# Altium PCB PCB1.PcbDoc
Units mm, origin at the board's own origin, x right, y up, seen from the top; angles counter-clockwise.
Board outline 90 x 105 mm, 4 copper layers (Top Layer, Signal Layer 1, Signal Layer 2, Bottom Layer), stack 0.778 mm thick; 73 components, 98 nets, 280 pads, 62 vias.
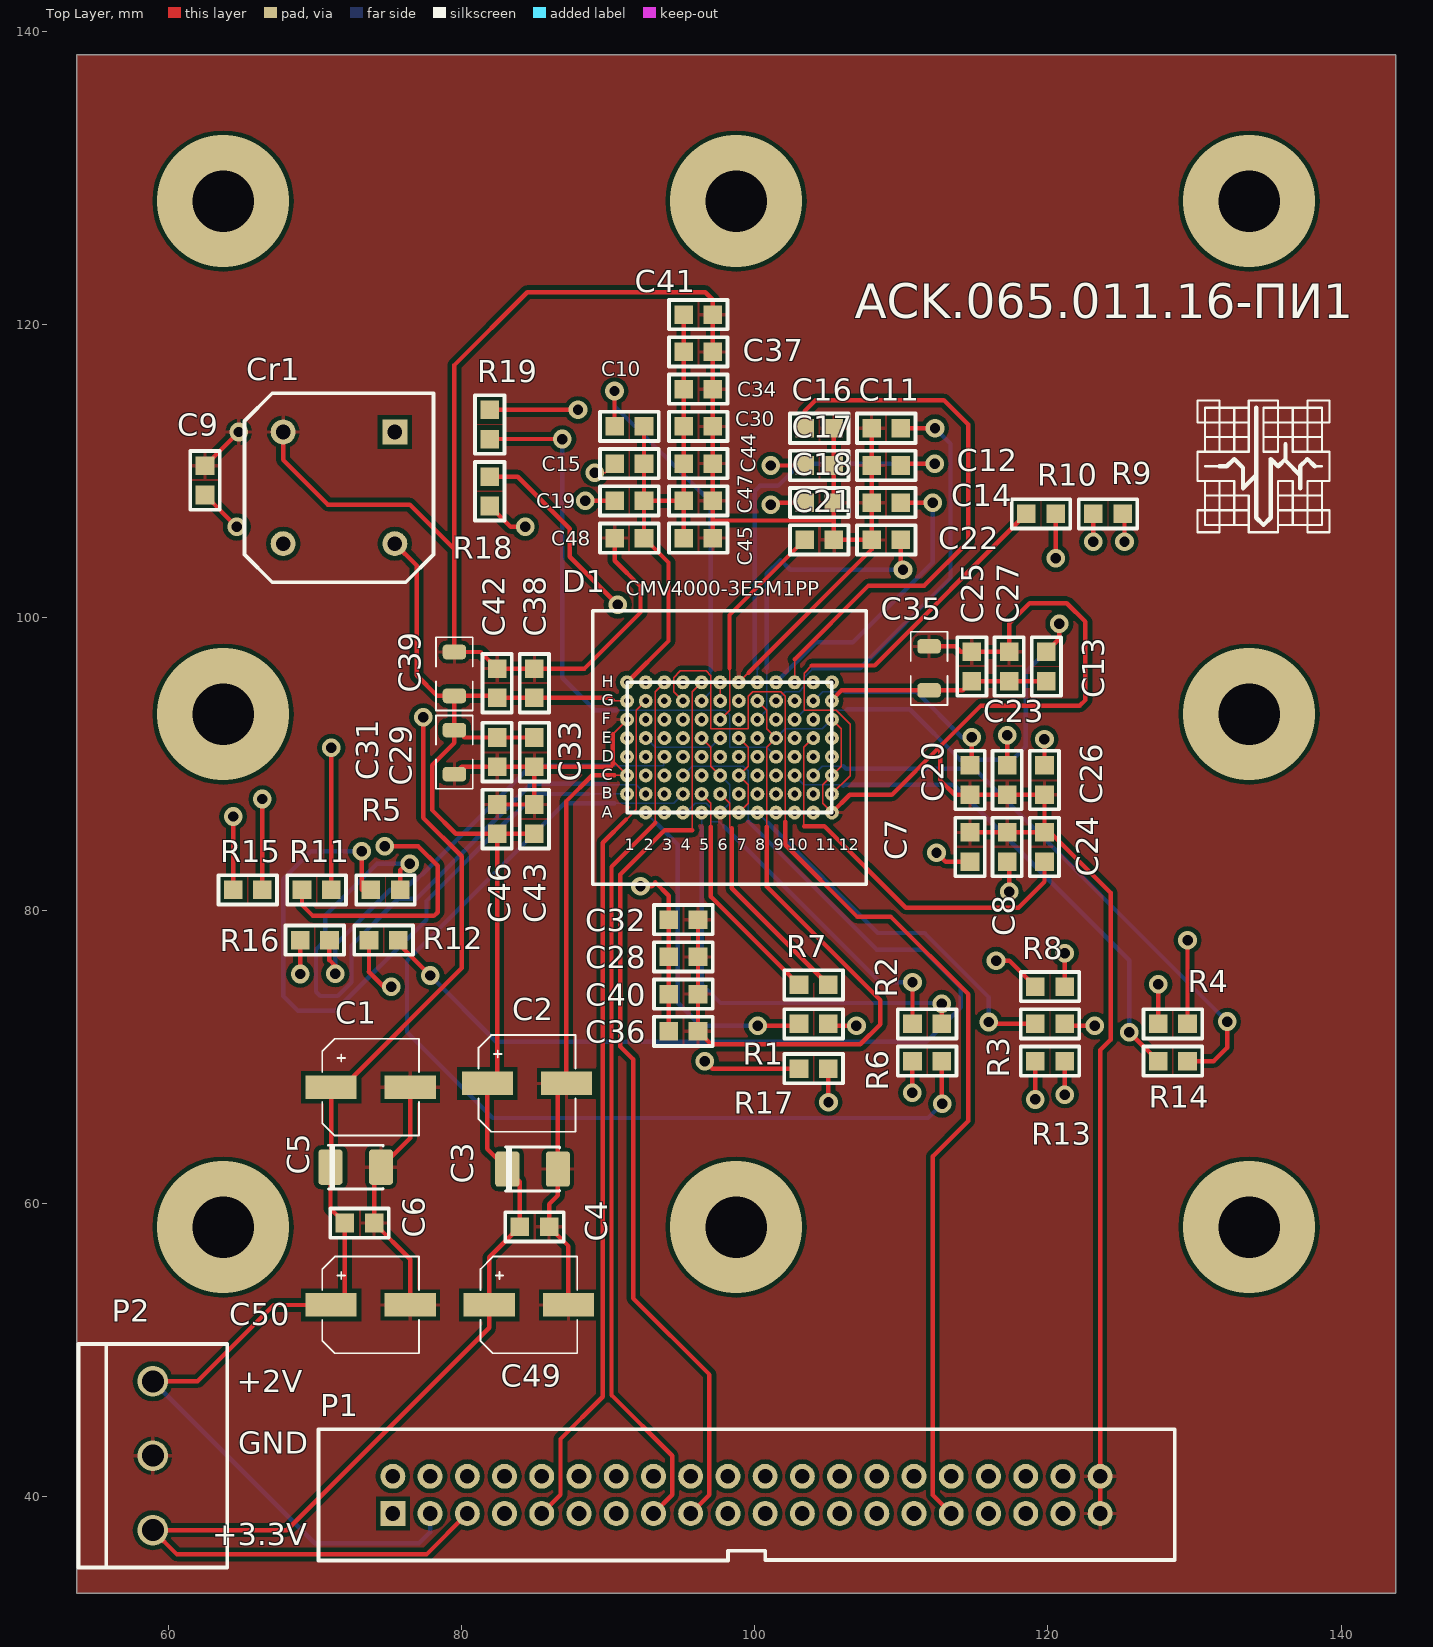
[diagram p0: Top Layer view]
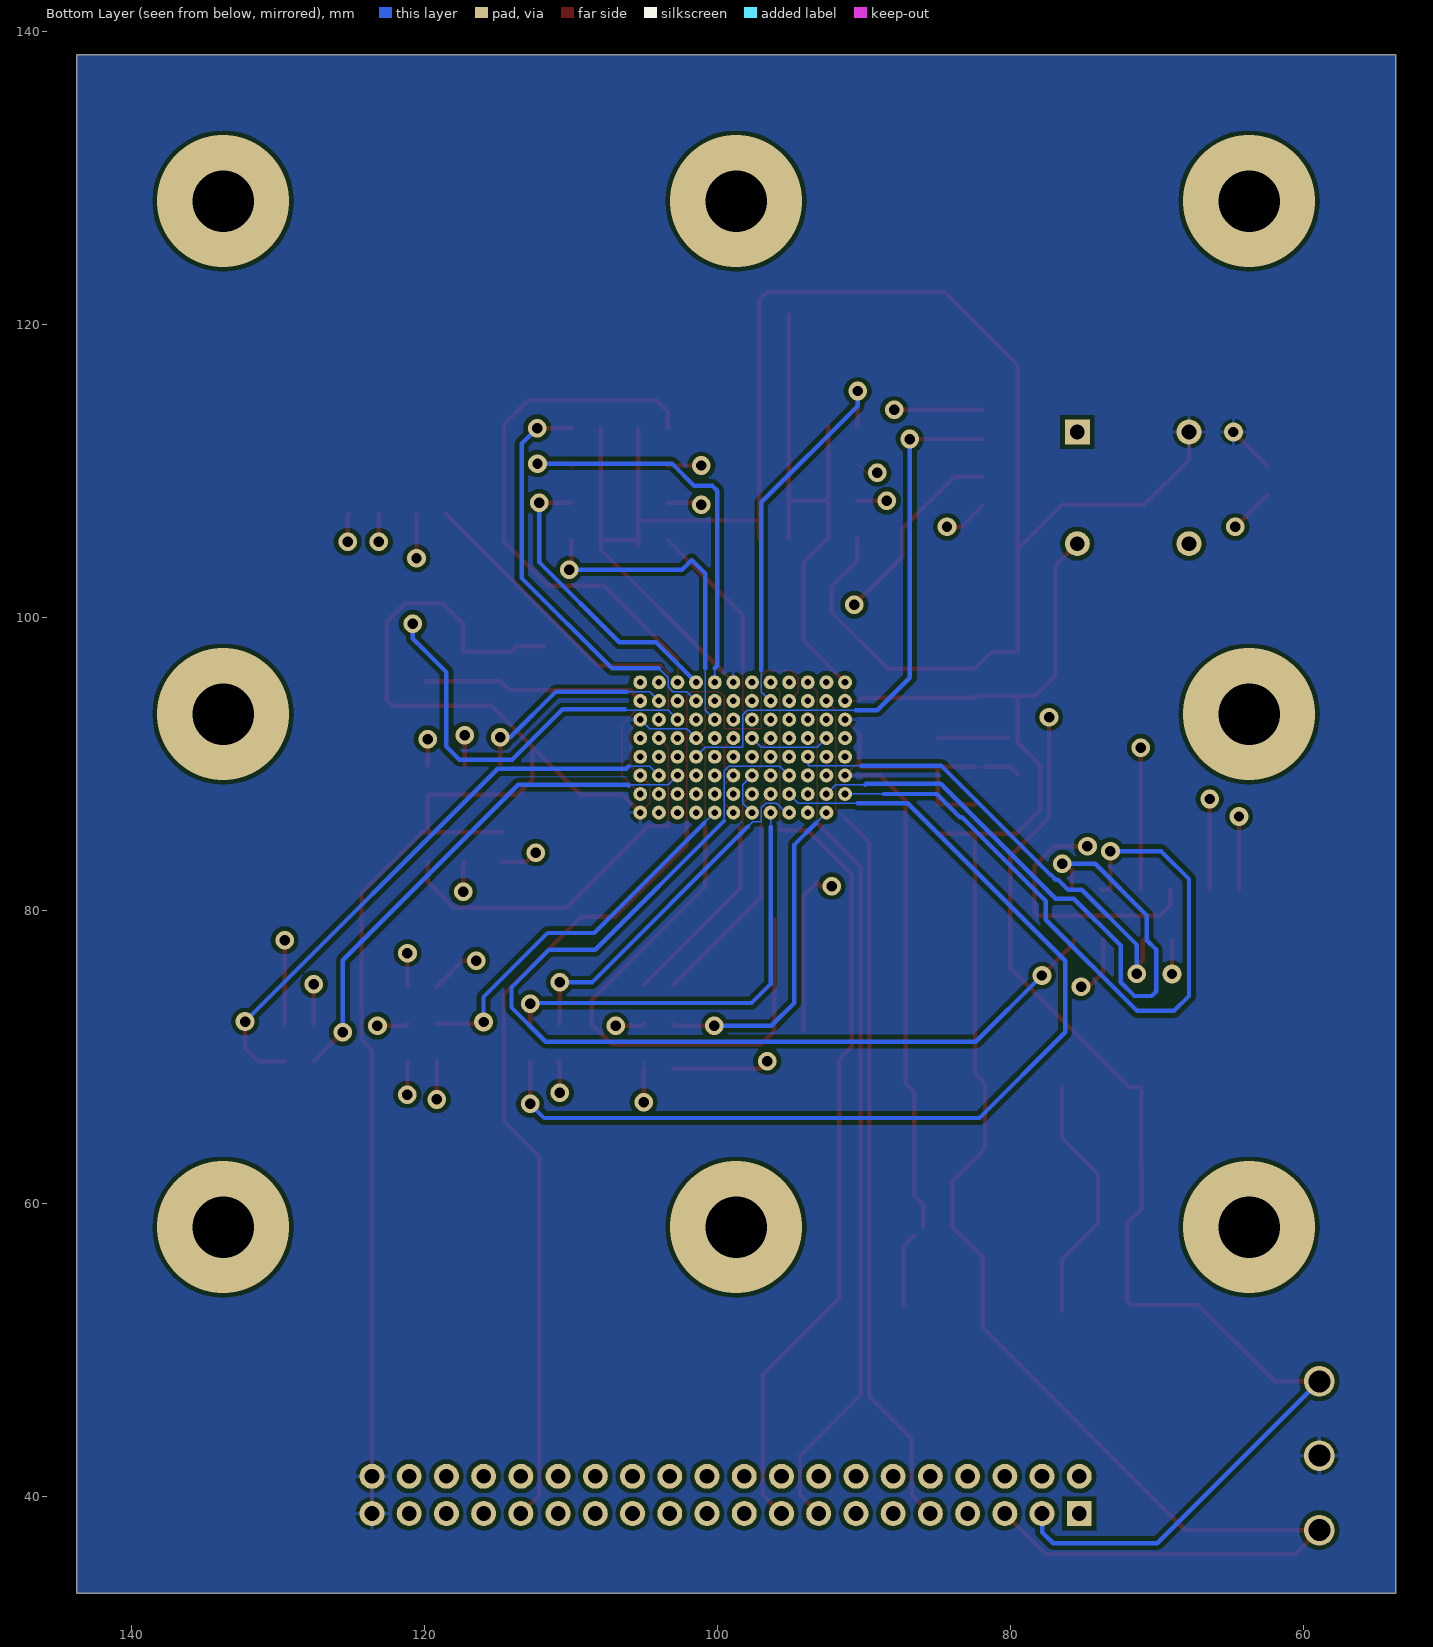
[diagram p1: Bottom Layer view, seen from below]
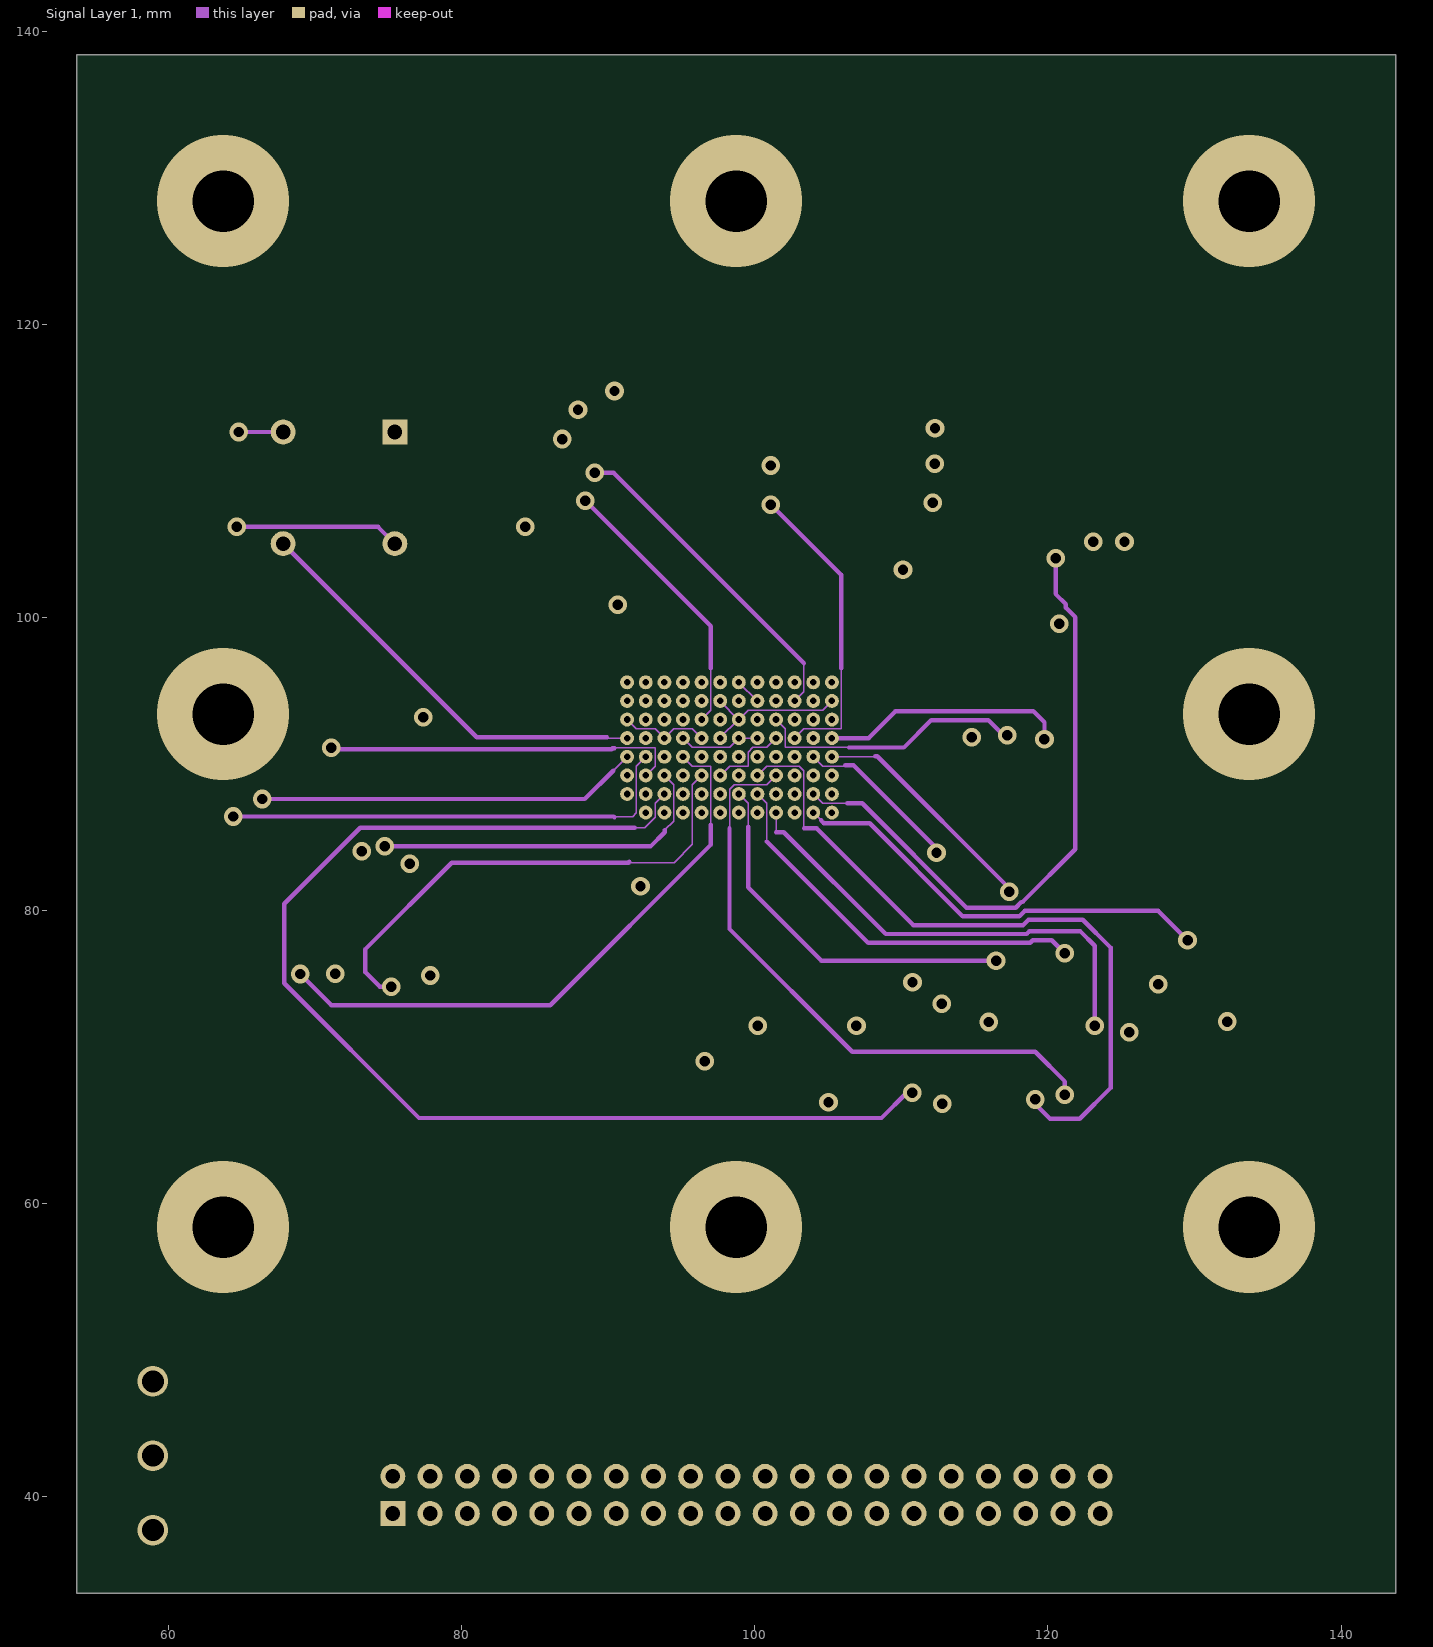
[diagram p2: Signal Layer 1]
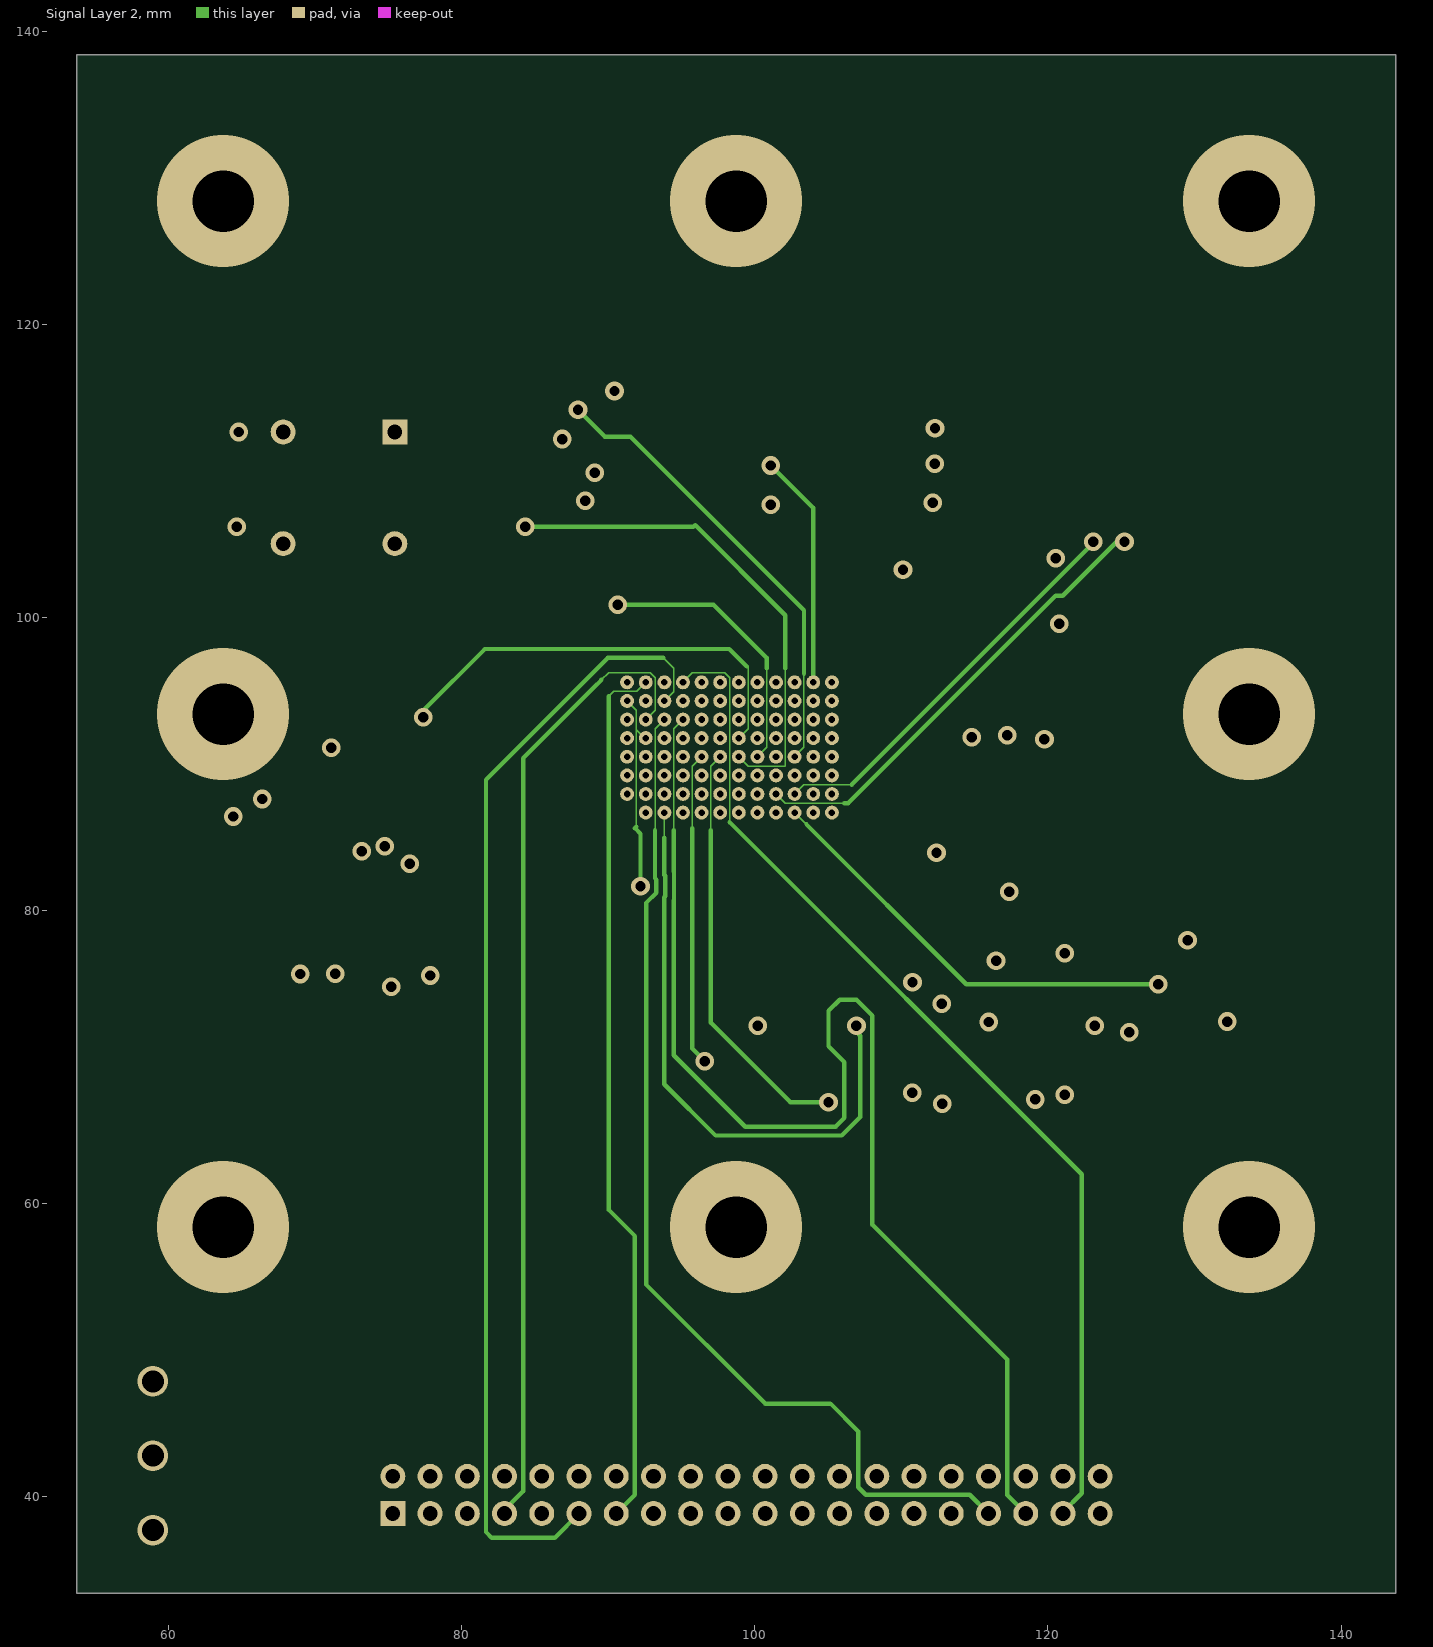
[diagram p3: Signal Layer 2]

## Layer stack, top to bottom
Top Solder: solder mask 0.0102, Solder Resist, Dk 3.5
Top Layer: signal copper 0.0356
Dielectric 1: core 0.254, FR-4, Dk 4.2
Signal Layer 1: signal copper 0.036
Dielectric 3: prepreg 0.127, Dk 4.2
Signal Layer 2: signal copper 0.036
Dielectric 2: core 0.254, Dk 4.2
Bottom Layer: signal copper 0.0356
Bottom Solder: solder mask 0.0102, Solder Resist, Dk 3.5

## Board outline
53.721,33.401 53.721,138.401 143.721,138.401 143.721,33.401

## Design rules (kind name [scope] priority, off if disabled: settings)
Clearance [All] p1: gap=0.1 except(0.3: Arc-Poly Track-Poly SMDPad-Poly THPad-Poly Via-Poly Fill-Poly Poly-Poly)
HoleSize [All] p1: absolutevalues=TRUE maxlimit=5 minlimit=0.025 maxpercent=80.000 minpercent=20.000
MinimumSolderMaskSliver [All] p1: minsoldermaskwidth=0.1
PolygonConnect [All] p1: connectstyle=Relief reliefconductorwidth=0.254 reliefentries=4 polygonreliefangle="90 Angle" airgapwidth=0.254
RoutingVias [All] p1: holewidth=0.711 width=1.27 viastyle="Through Hole" minholewidth=0.711 minwidth=1.27 maxholewidth=0.711 maxwidth=1.27
SilkToSilkClearance [All] p1 off: silktosilkclearance=0.254
SilkToSolderMaskClearance [IsPad] p1 off: minsilkscreentomaskgap=0.254 clearancetoexposedcopper=TRUE
SolderMaskExpansion [All] p1: expansion=0.102
Width [All] p1: maxlimit=0.3 minlimit=0.1 preferedwidth=0.1
26 further rules are at their usual default settings.

## Components (designator, comment, footprint, x,y, rotation, side; value= is the part's Value field where it differs from the comment)
C1 "220u" "EL SMD Case D D6.3x6.6 h7.7(0605)" 84.455,68.199 r0 top
C2 "33uF" "EL Case B (3528-21)" 84.836,62.357 r0 top
C3 "220u" "EL SMD Case D D6.3x6.6 h7.7(0605)" 73.787,67.945 r0 top
C4 "10uF" C_0805 84.963,58.42 r180 top
C5 "33uF" "EL Case B (3528-21)" 72.771,62.484 r0 top
C6 "10uF" C_0805 73.025,58.674 r180 top
C7 "100nF" C_0805 114.681,84.328 r270 top
C8 "100nF" C_0805 117.221,84.328 r90 top
C9 "100nF" C_0805 62.484,109.347 r90 top
C10 "100nF" C_0805 91.44,113.03 r180 top
C11 "100nF" C_0805 108.966,112.903 r0 top
C12 "100nF" C_0805 108.966,110.363 r0 top
C13 "100nF" C_0805 119.888,96.647 r90 top
C14 "100nF" C_0805 108.966,107.823 r0 top
C15 "100nF" C_0805 91.44,110.49 r180 top
C16 "100nF" C_0805 104.394,112.903 r180 top
C17 "100nF" C_0805 104.394,110.363 r180 top
C18 "100nF" C_0805 104.394,107.823 r180 top
C19 "100nF" C_0805 91.44,107.95 r180 top
C20 "100nF" C_0805 114.681,88.9 r90 top
C21 "100nF" C_0805 104.394,105.283 r180 top
C22 "100nF" C_0805 108.966,105.283 r0 top
C23 "100nF" C_0805 117.221,88.9 r90 top
C24 "100nF" C_0805 119.761,84.328 r270 top
C25 "100nF" C_0805 114.808,96.647 r90 top
C26 "100nF" C_0805 119.761,88.9 r90 top
C27 "4.7uF" C_0805 117.348,96.647 r90 top
C28 "100nF" C_0805 95.123,76.835 r0 top
C29 "100nF" C_0805 82.423,90.805 r270 top
C30 "100nF" C_0805 96.139,113.03 r0 top
C31 "100u" C1206(3216) 79.502,90.805 r270 top
C32 "4.7uF" C_0805 95.123,79.375 r0 top
C33 "4.7uF" C_0805 84.963,90.805 r270 top
C34 "4.7uF" C_0805 96.139,115.57 r0 top
C35 "100u" C1206(3216) 111.887,96.52 r90 top
C36 "100nF" C_0805 95.123,71.755 r0 top
C37 "100nF" C_0805 96.139,118.11 r0 top
C38 "100nF" C_0805 84.963,95.504 r90 top
C39 "100u" C1206(3216) 79.502,96.139 r90 top
C40 "4.7uF" C_0805 95.123,74.295 r0 top
C41 "4.7uF" C_0805 96.139,120.65 r0 top
C42 "4.7uF" C_0805 82.423,95.504 r90 top
C43 "100nF" C_0805 84.963,86.233 r90 top
C44 "100nF" C_0805 96.139,110.49 r0 top
C45 "100nF" C_0805 96.139,105.41 r0 top
C46 "4.7uF" C_0805 82.423,86.233 r90 top
C47 "4.7uF" C_0805 96.139,107.95 r0 top
C48 "4.7uF" C_0805 91.44,105.41 r180 top
C49 "100u" "EL SMD Case D D6.3x6.6 h7.7(0605)" 84.582,53.086 r0 top
C50 "100u" "EL SMD Case D D6.3x6.6 h7.7(0605)" 73.787,53.086 r0 top
Cr1 "5MHz" quarts_gen_2.54 71.628,108.839 r270 top
D1 "CMV4000-3E5M1PP" cmv4000 91.44,86.741 r0 top
P1 "IDC-40" IDC-40 99.434,40.126 r90 top
P2 "MPW-3" MPW-3 58.928,42.799 r270 top
R1 "100 Ом" R_0805 104.013,72.263 r180 top
R2 "100 Ом" R_0805 111.76,72.263 r180 top
R3 "100 Ом" R_0805 120.142,72.263 r180 top
R4 "100 Ом" R_0805 128.524,72.263 r180 top
R5 "100 Ом" R_0805 74.803,81.407 r180 top
R6 "100 Ом" R_0805 111.76,69.723 r180 top
R7 "100 Ом" R_0805 104.013,74.93 r180 top
R8 "100 Ом" R_0805 120.142,74.803 r180 top
R9 "100 Ом" R_0805 124.095,107.061 r0 top
R10 "100 Ом" R_0805 119.523,107.061 r0 top
R11 "100 Ом" R_0805 70.104,81.407 r0 top
R12 "100 Ом" R_0805 74.676,77.978 r0 top
R13 "100 Ом" R_0805 120.142,69.723 r180 top
R14 "100 Ом" R_0805 128.524,69.723 r180 top
R15 "100 Ом" R_0805 65.405,81.407 r0 top
R16 "100 Ом" R_0805 69.977,77.978 r0 top
R17 "100 Ом" R_0805 104.013,69.215 r180 top
R18 "100 Ом" R_0805 81.915,108.601 r270 top
R19 "100 Ом" R_0805 81.915,113.157 r270 top

## Footprints (in the part's own frame and the unit in brackets; to place one, negate y for a bottom-side part, rotate by r counter-clockwise, add the part's x,y. Pads: shape width x height; smd on the part's side, far side on the other; paste and mask are expansions set on the pad)
C1206(3216) [mm]
  rrect50% 1x1.6 smd: 1(-1.5,0) 2(1.5,0)
  silkscreen extent -2.5,-1.25 2.5,1.25, body extent -1.6,-0.8 1.6,0.8, height 1
C_0805 [mm]
  rect 1.27x1.27 smd: 1(-1,0) 2(1,0)
  silkscreen extent -2,-1 2,1
cmv4000 [mm]
  round 0.95 hole 0.45: A2(1.117,-0.062) A3(2.387,-0.062) A4(3.657,-0.062) A5(4.927,-0.062) A6(6.197,-0.062) A7(7.467,-0.062) A8(8.737,-0.062) A9(10.007,-0.062) A10(11.277,-0.062) A11(12.547,-0.062) A12(13.817,-0.062) B1(-0.153,1.208) B2(1.117,1.208) B3(2.387,1.208) B4(3.657,1.208) B5(4.927,1.208) B6(6.197,1.208) B7(7.467,1.208) B8(8.737,1.208) B9(10.007,1.208) B10(11.277,1.208) B11(12.547,1.208) B12(13.817,1.208) C1(-0.153,2.478) C2(1.117,2.478) C3(2.387,2.478) C4(3.657,2.478) C5(4.927,2.478) C6(6.197,2.478) C7(7.467,2.478) C8(8.737,2.478) C9(10.007,2.478) C10(11.277,2.478) C11(12.547,2.478) C12(13.817,2.478) D1(-0.153,3.748) D2(1.117,3.748) D3(2.387,3.748) D4(3.657,3.748) D5(4.927,3.748) D6(6.197,3.748) D7(7.467,3.748) D8(8.737,3.748) D9(10.007,3.748) D10(11.277,3.748) D11(12.547,3.748) D12(13.817,3.748) E1(-0.153,5.018) E2(1.117,5.018) E3(2.387,5.018) E4(3.657,5.018) E5(4.927,5.018) E6(6.197,5.018) E7(7.467,5.018) E8(8.737,5.018) E9(10.007,5.018) E10(11.277,5.018) E11(12.547,5.018) E12(13.817,5.018) F1(-0.153,6.288) F2(1.117,6.288) F3(2.387,6.288) F4(3.657,6.288) F5(4.927,6.288) F6(6.197,6.288) F7(7.467,6.288) F8(8.737,6.288) F9(10.007,6.288) F10(11.277,6.288) F11(12.547,6.288) F12(13.817,6.288) G1(-0.153,7.558) G2(1.117,7.558) G3(2.387,7.558) G4(3.657,7.558) G5(4.927,7.558) G6(6.197,7.558) G7(7.467,7.558) G8(8.737,7.558) G9(10.007,7.558) G10(11.277,7.558) G11(12.547,7.558) G12(13.817,7.558) H1(-0.153,8.828) H2(1.117,8.828) H3(2.387,8.828) H4(3.657,8.828) H5(4.927,8.828) H6(6.197,8.828) H7(7.467,8.828) H8(8.737,8.828) H9(10.007,8.828) H10(11.277,8.828) H11(12.547,8.828) H12(13.817,8.828)
  silkscreen extent -2.49,-4.94 16.16,13.71
"EL Case B (3528-21)" [mm] "Capacitor, SM Tantalum; Body 3.5 x 2.8 mm (LxW typ)"
  rrect25% 1.65x2.4 smd: 1(-1.725,0) 2(1.725,0)
  silkscreen extent -1.85,-1.5 1.85,1.5, body extent -1.75,-1.4 1.75,1.4, height 1.91
"EL SMD Case D D6.3x6.6 h7.7(0605)" [mm]
  rect 3.5x1.6 smd mask+0.102: 1(-2.7,0) 2(2.7,0)
  silkscreen extent -3.3,-3.3 3.3,3.3, body extent -3.5,-3.3 3.5,3.3, height 7.7
IDC-40 [mm]
  rect 1.7x1.7 hole 1: 1(-1.27,24.13)
  round 1.7 hole 1: 2(1.27,24.13) 3(-1.27,21.59) 4(1.27,21.59) 5(-1.27,19.05) 6(1.27,19.05) 7(-1.27,16.51) 8(1.27,16.51) 9(-1.27,13.97) 10(1.27,13.97) 11(-1.27,11.43) 12(1.27,11.43) 13(-1.27,8.89) 14(1.27,8.89) 15(-1.27,6.35) 16(1.27,6.35) 17(-1.27,3.81) 18(1.27,3.81) 19(-1.27,1.27) 20(1.27,1.27) 21(-1.27,-1.27) 22(1.27,-1.27) 23(-1.27,-3.81) 24(1.27,-3.81) 25(-1.27,-6.35) 26(1.27,-6.35) 27(-1.27,-8.89) 28(1.27,-8.89) 29(-1.27,-11.43) 30(1.27,-11.43) 31(-1.27,-13.97) 32(1.27,-13.97) 33(-1.27,-16.51) 34(1.27,-16.51) 35(-1.27,-19.05) 36(1.27,-19.05) 37(-1.27,-21.59) 38(1.27,-21.59) 39(-1.27,-24.13) 40(1.27,-24.13)
  silkscreen extent -4.47,-29.21 4.48,29.21
MPW-3 [mm]
  round 2.1 hole 1.5: 1(-5.08,0) 2(0,0) 3(5.08,0)
  silkscreen extent -7.62,-5.08 7.62,5.08
quarts_gen_2.54 [mm]
  rect 1.7x1.7 hole 1: 1(-3.81,3.81)
  round 1.7 hole 1: 4(-3.81,-3.81) 5(3.81,-3.81) 8(3.81,3.81)
  silkscreen extent -6.45,-6.45 6.45,6.45
R_0805 [mm]
  rect 1.27x1.27 smd: 1(-1,0) 2(1,0)
  silkscreen extent -2,-1 2,1

## Part data
C1 C3 C49 C50: library part "EL 100u/25V", "EL 25V SMD Case C D6.3x6.6 h7.7"
C2 C5: library part "EL Case B (3528-21)", "EL Tantalum Case B (3528-21)"
C4 C6 C7 C8 C9 C10 C11 C12 C13 C14 C15 C16 C17 C18 C19 C20 C21 C22 C23 C24 C25 C26 C27 C28 C29 C30 C32 C33 C34 C36 C37 C38 C40 C41 C42 C43 C44 C45 C46 C47 C48: library part "capacitor 0805"
C31 C35 C39: library part "C-1206  1000V 1n", "SMD-1206 1000V X7R 10%"
Cr1: library part quarts_gen_2.54
P1: "разъем 2529"
R1 R2 R3 R4 R5 R6 R7 R8 R9 R10 R11 R12 R13 R14 R15 R16 R17 R18 R19: library part "resistor 0805"

## Via types
v1: diameter 1.27, hole 0.711, Top Layer to Bottom Layer, 54 vias
v2: diameter 9, hole 4.2, Top Layer to Bottom Layer, 8 vias

## Nets (pads, with @x,y where several pads share a name; then routed paths per layer and width w, separated by ;. In a path a pad name is that pad's centre, name@x,y a point inside that pad or via, vN(x,y) a via of type N, cw(c..) or ccw(c..) an arc to the next point about the centre after c; other vN are vias at no path point)
3V: P1.2
5V: P1.1
+6V: 
+6V: C1.1 C2.1 C4.2 C9.1 C10.1 C13.1 C15.1 C19.1 C25.1 C27.1 C28.1 C29.1 C30.1 C31.1 C32.1 C33.1 C34.1 C35.1 C36.1 C37.1 C38.1 C39.1 C40.1 C41.1 C42.1 C43.1 C44.1 C45.1 C46.1 C47.1 C48.1 C49.1 Cr1.8 D1.E2 D1.E6 D1.F7 D1.G1 D1.G6 D1.G12 D1.H1 D1.H6 P1.5 P2.3 | length 244.3
  Top Layer w0.1: 90.297,94.299 D1.G1 D1.H1 ; D1.G6 D1.H6 ; D1.G12 D1.G12@105.29,94.331
  Top Layer w0.3: C9.1 v1(64.659,106.172) ; Cr1.8 76.93,103.537 76.93,96.044 78.335,94.639 C39.1 ; 80.172,91.805 C29.1 C33.1 ; P1.5 77.596,36.068 60.579,36.068 P2.3 68.072,37.719 81.882,51.529 C49.1 81.882,56.339 C4.2 83.963,61.505 C2.1 81.737,63.731 81.737,68.199 82.423,68.885 C46.1 ; C43.1 C46.1 ; 90.297,94.361 90.154,94.504 C38.1 C42.1 82.288,94.639 C39.1 ; D1.H1 94.107,98.388 94.107,103.743 C48.1 C19.1 ; v1(92.202,81.661) 92.964,81.661 93.218,81.915 94.123,81.01 C32.1 C28.1 C40.1 C36.1 ; C10.1 C15.1 C19.1 ; C45.1 C47.1 ; C41.1 C37.1 C34.1 C30.1 C44.1 C47.1 ; D1.G12@105.257,94.364 105.914,95.02 C35.1 114.181,95.02 C25.1 C27.1 C13.1 ; C39.1 C31.1 79.502,91.44 77.978,89.916 77.978,86.856 79.601,85.233 C46.1 ; C19.1 C47.1
  Signal Layer 1 w0.1: D1.E6 97.637,91.809 D1.F7@98.882,93.029 ; D1.G6 97.637,94.273 D1.F7@98.882,93.029 ; D1.G12 104.622,93.664 99.542,93.664 D1.F7 D1.F7@98.882,93.029
  Signal Layer 1 w0.3: v1(64.659,106.172) 74.295,106.172 Cr1.8
  Signal Layer 2 w0.1: D1.G1 91.923,93.663 91.923,92.329 ; 91.923,85.725 91.923,91.124 91.923,92.329 ; D1.E2 92.493,91.759 91.923,92.329
  Signal Layer 2 w0.3: 91.923,85.725 91.821,85.623 92.202,85.242 v1(92.202,81.661)
  Bottom Layer w0.1: D1.E2 93.192,91.124 97.002,91.124 D1.E6
+24V: 
+24V: C3.1 C5.1 C6.2 C50.1 D1.A7 D1.C7 D1.E4 D1.E7 D1.E8 P1.3 P2.1 | length 127.6
  Top Layer w0.1: D1.A7 99.543,87.314 99.543,88.583 D1.C7 99.543,89.854 99.543,91.123 D1.E7
  Top Layer w0.3: P2.1 61.976,47.879 67.183,53.086 C50.1 71.755,53.086 72.025,53.356 C6.2 71.046,59.653 C5.1 71.087,62.525 C3.1 71.882,67.945 80.01,76.073 80.01,83.693 77.368,86.335 v1(77.368,93.192)
  Signal Layer 1 w0.1: D1.E4 95.732,91.124 98.272,91.124 D1.E7 D1.E8
  Signal Layer 2 w0.1: D1.E7 99.543,92.394 99.543,96.545 99.441,96.647
  Signal Layer 2 w0.3: v1(77.368,93.192) 77.368,93.624 81.585,97.841 98.247,97.841 99.441,96.647
  Bottom Layer w0.3: P2.1 69.977,36.83 77.089,36.83 77.844,37.585 P1.3
-24V: P1.4
GND: C1.2 C2.2 C3.2 C4.1 C5.2 C6.1 C7.1 C8.2 C9.2 C11.1 C12.1 C14.1 C16.1 C17.1 C18.1 C20.1 C21.1 C22.1 C23.1 C24.1 C25.2 C26.1 C27.2 C28.2 C29.2 C30.2 C31.2 C32.2 C33.2 C34.2 C35.2 C36.2 C37.2 C38.2 C39.2 C40.2 C41.2 C42.2 C43.2 C44.2 C45.2 C46.2 C47.2 C48.2 C49.2 C50.2 Cr1.4 D1.A6 D1.A12 D1.C1 D1.C6 D1.C12 D1.E3 D1.E5 D1.E9 D1.F1 D1.F12 D1.G8 D1.H7 P1.39 P1.40 P2.2 | length 401.1
  Top Layer w0.1: 81.696,89.805 C29.2 ; C49.2@86.995,53.086 C49.2 ; C1.2@87.147,68.199 C1.2 ; 90.297,90.209 D1.C1 90.424,89.219 ; 90.297,92.038 D1.F1 ; D1.E5 97.003,91.123 97.003,89.853 D1.C6 ; D1.H7 99.568,96.229 ; D1.G8 100.813,93.663 100.813,92.393 D1.E9 100.813,91.124 100.813,85.725 ; D1.A12 104.623,87.313 104.623,88.584 D1.C12 105.893,89.854 105.893,92.393 D1.F12
  Top Layer w0.3: C9.2 v1(64.786,112.649) ; Cr1.4 67.818,110.744 70.866,107.696 76.454,107.696 79.502,104.648 ; C50.2@76.487,52.672 C50.2 76.487,56.212 C6.1 74.025,62.013 C5.2 76.487,64.475 C3.2 ; C31.2 80.002,89.805 81.696,89.805 ; C46.2 C43.2 C33.2 ; C29.2 C33.2 ; C4.1 85.963,59.96 86.561,60.558 C2.2 86.561,67.605 C1.2 ; C4.1@86.561,57.822 87.282,57.101 C49.2 ; C1.2@87.147,68.199 87.147,87.466 88.9,89.219 90.424,89.219 ; 90.297,92.038 90.297,90.209 90.297,89.932 90.17,89.805 C33.2 ; C48.2 90.44,103.87 92.202,102.108 92.202,100.33 88.376,96.504 C38.2 C42.2 81.288,97.639 C39.2 79.502,104.648 ; C32.2 C28.2 C40.2 C36.2 97.012,70.866 107.198,70.866 108.56,72.227 108.56,73.889 100.813,81.636 100.813,85.725 ; C45.2 97.139,106.68 ; 99.568,96.229 107.966,104.627 C22.1 ; D1.A12 106.479,87.9 109.353,87.9 112.639,91.186 ; C21.1@105.394,104.902 C18.1 C17.1 C16.1 ; C21.1 C22.1 ; 105.394,106.68 105.325,106.611 97.208,106.611 97.139,106.68 ; C11.1 C12.1 C14.1 C22.1 ; C35.2 113.689,98.02 114.062,97.647 C25.2 C27.2 117.348,99.568 118.745,100.965 121.285,100.965 122.555,99.695 122.555,94.361 122.174,93.98 115.433,93.98 112.639,91.186 ; C7.1 C8.2 C24.1 ; P1.39 P1.40 123.564,70.478 124.275,71.189 124.275,81.211 120.158,85.328 C24.1 ; 79.502,104.648 79.502,117.221 84.471,122.19 96.615,122.19 97.139,121.666 C41.2 C37.2 C34.2 C30.2 C44.2 C47.2 97.139,106.68 ; 112.639,91.186 112.639,88.91 113.649,87.9 C20.1 C23.1 C26.1 C24.1
  Signal Layer 1 w0.1: D1.F1 91.922,92.394 93.192,92.394 D1.E3 94.462,92.394 95.732,92.394 D1.E5 ; D1.C6 98.272,89.854 99.543,89.854 99.543,90.805 99.871,91.133 100.822,91.133 D1.E9 ; D1.H7 98.907,95.543 100.152,94.299 D1.G8
  Signal Layer 1 w0.3: v1(64.786,112.649) Cr1.4
  Bottom Layer w0.1: D1.A6 98.273,87.314 98.273,88.583 D1.C6 ; D1.E9 102.073,92.384 104.613,92.384 D1.F12
GND24: P1.38
NetC7_2: C7.2 D1.D11 | length 13.9
  Top Layer w0.3: v1(112.395,83.947) 113.014,83.328 C7.2
  Signal Layer 1 w0.1: D1.D11 104.632,89.844 106.172,89.844
  Signal Layer 1 w0.3: 106.172,89.916 106.731,89.916 112.395,84.252 v1(112.395,83.947)
NetC8_1: C8.1 D1.D12 | length 18.2
  Top Layer w0.3: C8.1 117.348,83.201 v1(117.348,81.28)
  Signal Layer 1 w0.1: D1.D12 108.204,90.489
  Signal Layer 1 w0.3: 108.204,90.524 108.358,90.524 117.348,81.534 v1(117.348,81.28)
NetC10_2: C10.2 D1.G5 | length 26.6
  Top Layer w0.3: v1(90.424,115.443) 90.424,113.046 C10.2
  Bottom Layer w0.1: D1.G5 97.003,94.934 97.003,96.393
  Bottom Layer w0.3: v1(90.424,115.443) 90.424,114.427 97.003,107.848 97.003,96.393
NetC11_2: C11.2 D1.G9 | length 28.7
  Top Layer w0.3: C11.2 v1(112.293,112.903)
  Bottom Layer w0.1: D1.G9 102.073,94.924 103.026,94.924 103.353,95.25 103.353,95.885 103.988,96.52
  Bottom Layer w0.3: 103.988,96.52 107.188,96.52 113.353,102.685 113.353,111.843 v1(112.293,112.903)
NetC12_2: C12.2 D1.H8 | length 28.5
  Top Layer w0.3: C12.2 110.093,110.49 v1(112.268,110.49)
  Bottom Layer w0.1: D1.H8 100.177,96.52
  Bottom Layer w0.3: 100.177,96.52 100.007,96.69 100.007,108.643 100.33,108.966 101.575,108.966 103.099,110.49 v1(112.268,110.49)
NetC13_2: C13.2 D1.F10 | length 29.4
  Top Layer w0.1: C13.2 C13.2@120.015,97.774
  Top Layer w0.3: C13.2@120.015,97.774 120.777,98.536 v1(120.777,99.568)
  Bottom Layer w0.1: D1.F10 103.362,93.673 106.299,93.673
  Bottom Layer w0.3: 106.299,93.726 110.566,93.726 113.995,90.297 117.602,90.297 118.491,91.186 118.491,96.266 120.777,98.552 v1(120.777,99.568)
NetC14_2: C14.2 D1.H9 | length 20.3
  Top Layer w0.3: C14.2 v1(112.141,107.823)
  Bottom Layer w0.3: D1.H9 104.177,98.298 106.69,98.298 112.141,103.749 v1(112.141,107.823)
NetC15_2: C15.2 D1.G10 | length 24.1
  Top Layer w0.1: v1(89.078,109.855) 89.805,109.855 C15.2
  Signal Layer 1 w0.1: D1.G10 103.353,94.934 103.353,96.876
  Signal Layer 1 w0.3: v1(89.078,109.855) 90.373,109.855 103.353,96.876
NetC16_2: C16.2 D1.H10 | length 38
  Top Layer w0.1: D1.H10 102.717,97.129
  Top Layer w0.3: 102.717,97.129 107.754,102.166 111.564,102.166 114.554,105.156 114.554,113.157 112.903,114.808 104.14,114.808 103.394,114.062 C16.2
NetC17_2: C17.2 D1.H11 | length 18.3
  Top Layer w0.3: v1(101.092,110.363) C17.2
  Signal Layer 2 w0.3: v1(101.092,110.363) 103.987,107.468 D1.H11
NetC18_2: C18.2 D1.E10 | length 23.1
  Top Layer w0.3: v1(101.092,107.696) 101.219,107.823 C18.2
  Signal Layer 1 w0.1: D1.E10 103.352,92.394 105.893,92.394 105.893,96.52
  Signal Layer 1 w0.3: v1(101.092,107.696) 105.893,102.895 105.893,96.52
NetC19_2: C19.2 D1.F5 | length 20.7
  Top Layer w0.3: v1(88.443,107.95) C19.2
  Signal Layer 1 w0.1: D1.F5 97.003,93.664 97.003,96.52
  Signal Layer 1 w0.3: v1(88.443,107.95) 97.003,99.39 97.003,96.52
NetC20_2: C20.2 D1.G11 | length 14.3
  Top Layer w0.1: C20.2 C20.2@114.808,90.027
  Top Layer w0.3: C20.2@114.808,90.027 v1(114.808,91.821)
  Bottom Layer w0.1: D1.G11 104.622,94.934 106.172,94.934
  Bottom Layer w0.3: 106.172,94.934 111.01,94.934 114.122,91.821 v1(114.808,91.821)
NetC21_2: C21.2 D1.F6 | length 14.6
  Top Layer w0.1: D1.F6 98.273,93.664 98.273,96.52
  Top Layer w0.3: 98.273,96.52 98.273,100.162 C21.2
NetC22_2: C22.2 D1.F8 | length 22.3
  Top Layer w0.3: C22.2 109.966,103.394 v1(110.109,103.251)
  Bottom Layer w0.1: D1.F8 100.813,93.664 100.813,96.52
  Bottom Layer w0.3: 100.813,96.52 100.813,102.972 101.752,103.911 102.413,103.251 v1(110.109,103.251)
NetC23_2: C23.2 D1.F9 | length 20.6
  Top Layer w0.3: C23.2 v1(117.221,91.948)
  Signal Layer 1 w0.1: D1.F9 102.082,92.394 102.082,91.124 106.426,91.124
  Signal Layer 1 w0.3: 106.426,91.124 110.174,91.124 112.041,92.991 115.924,92.991 116.967,91.948 v1(117.221,91.948)
NetC24_2: C24.2 D1.E11 | length 27.1
  Top Layer w0.1: 103.353,85.75 103.353,91.124 D1.E11
  Top Layer w0.3: 103.353,85.75 104.75,85.75 110.305,80.195 117.99,80.195 119.761,81.966 C24.2
NetC26_2: C26.2 D1.E12 | length 18.5
  Top Layer w0.3: C26.2 v1(119.761,91.694)
  Signal Layer 1 w0.3: D1.E12 107.761,91.759 109.593,93.591 119.007,93.591 119.761,92.837 v1(119.761,91.694)
NetCr1_5: Cr1.5 D1.E1 | length 28.9
  Signal Layer 1 w0.1: 89.916,91.759 D1.E1
  Signal Layer 1 w0.3: Cr1.5 81.033,91.814 89.916,91.814
NetD1_A2: D1.A2 R1.2 | length 22.8
  Top Layer w0.3: v1(100.203,72.136) 102.886,72.136 R1.2
  Bottom Layer w0.1: D1.A2 93.257,85.979
  Bottom Layer w0.3: 93.257,85.979 94.742,84.494 94.742,73.711 96.317,72.136 v1(100.203,72.136)
NetD1_A3: D1.A3 R1.1 | length 42.2
  Top Layer w0.3: R1.1 105.14,72.136 v1(106.934,72.136)
  Signal Layer 2 w0.1: 93.827,84.963 D1.A3
  Signal Layer 2 w0.3: 93.827,84.963 93.827,82.418 93.887,82.359 93.887,80.963 93.827,80.904 93.827,68.148 97.325,64.651 105.926,64.651 107.188,65.913 107.188,71.45 106.934,71.704 v1(106.934,72.136)
NetD1_A4: D1.A4 R2.2 | length 24.5
  Top Layer w0.3: R2.2 v1(110.76,75.092)
  Bottom Layer w0.1: D1.A4 95.199,86.577 95.936,87.314 96.684,87.314 97.002,86.995 97.002,86.053 97.588,86.053 97.917,85.725
  Bottom Layer w0.3: 97.917,85.725 108.55,75.092 v1(110.76,75.092)
NetD1_A5: D1.A5 R2.1 | length 30
  Top Layer w0.3: R2.1 v1(112.76,73.635)
  Bottom Layer w0.1: 96.367,85.725 D1.A5
  Bottom Layer w0.3: 96.367,85.725 96.367,74.981 97.663,73.685 112.709,73.685 v1(112.76,73.635)
NetD1_A8: D1.A8 R3.2 | length 25.8
  Top Layer w0.3: v1@116.078,72.39 116.205,72.263 R3.2
  Bottom Layer w0.1: D1.A8 100.877,85.979
  Bottom Layer w0.3: 100.877,85.979 108.395,78.461 111.582,78.461 115.951,74.092 v1(115.951,72.39)
NetD1_A9: D1.A9 R3.1 | length 34
  Top Layer w0.3: R3.1 121.269,72.136 v1(123.19,72.136)
  Signal Layer 1 w0.1: 101.447,85.344 D1.A9
  Signal Layer 1 w0.3: 101.447,85.344 101.981,85.344 108.93,78.395 118.543,78.395 118.722,78.574 122.213,78.574 123.19,77.597 v1(123.19,72.136)
NetD1_A10: D1.A10 R4.2 | length 32.4
  Top Layer w0.3: R4.2 v1(127.524,74.971)
  Signal Layer 2 w0.1: D1.A10 103.525,85.872
  Signal Layer 2 w0.3: 103.525,85.872 114.425,74.971 v1(127.524,74.971)
NetD1_A11: D1.A11 R4.1 | length 35.2
  Top Layer w0.3: R4.1 v1(129.524,77.969)
  Signal Layer 1 w0.1: D1.A11 104.521,86.145
  Signal Layer 1 w0.3: 104.521,86.145 104.712,85.954 107.834,85.954 114.193,79.595 118.046,79.595 118.427,79.976 127.517,79.976 v1(129.524,77.969)
NetD1_B1: D1.B1 R5.2 | length 48.2
  Top Layer w0.3: v1(73.177,84.049) 73.177,81.407 R5.2
  Bottom Layer w0.1: 88.646,87.949 D1.B1
  Bottom Layer w0.3: v1(73.177,84.049) 69.723,84.049 67.818,82.144 67.818,74.168 68.834,73.152 71.374,73.152 77.597,79.375 77.597,80.645 83.312,86.36 83.439,86.36 85.028,87.949 88.646,87.949
NetD1_B2: D1.B2 R5.1 | length 45.2
  Top Layer w0.3: R5.1 75.803,82.763 76.225,83.185 v1(76.454,83.185)
  Bottom Layer w0.1: 89.916,88.584 91.922,88.584 D1.B2
  Bottom Layer w0.3: v1(76.454,83.185) 74.219,83.185 70.695,79.661 70.695,77.978 70.062,77.345 70.062,74.464 70.358,74.168 71.541,74.168 72.479,75.106 72.479,77.611 75.675,80.807 76.91,80.807 84.749,88.646 89.854,88.646 89.916,88.584
NetD1_B3: D1.B3 R6.2 | length 84.7
  Top Layer w0.3: v1(110.744,67.564) 110.744,69.485 110.871,69.612 R6.2
  Signal Layer 1 w0.1: 91.821,85.649 92.481,85.649 93.193,86.36 93.193,87.314 D1.B3
  Signal Layer 1 w0.3: 91.821,85.649 76.073,85.649 73.076,85.649 67.892,80.465 67.892,75.037 77.085,65.844 108.643,65.844 110.363,67.564 v1(110.744,67.564)
NetD1_B4: D1.B4 R6.1 | length 70.7
  Top Layer w0.3: R6.1 112.76,66.818 v1(112.776,66.802)
  Bottom Layer w0.1: 90.424,87.314 94.462,87.314 D1.B4
  Bottom Layer w0.3: 90.424,87.314 87.012,87.314 76.269,76.571 76.269,71.686 82.111,65.844 111.818,65.844 v1(112.776,66.802)
NetD1_B5: D1.B5 R7.2 | length 15.8
  Top Layer w0.1: D1.B5 97.003,87.313 97.003,85.725
  Top Layer w0.3: 97.003,85.725 97.003,80.94 R7.2
NetD1_B6: D1.B6 R7.1 | length 16
  Top Layer w0.1: D1.B6 98.273,87.313 98.273,85.598
  Top Layer w0.3: 98.425,85.598 98.425,81.518 R7.1
NetD1_B7: D1.B7 R8.2 | length 29
  Top Layer w0.3: v1(116.459,76.581) 117.364,76.581 R8.2
  Signal Layer 1 w0.1: D1.B7 99.543,87.313 99.543,85.725
  Signal Layer 1 w0.3: 99.543,85.725 99.543,81.578 104.539,76.581 v1(116.459,76.581)
NetD1_B8: D1.B8 R8.1 | length 29.4
  Top Layer w0.1: v1@121.142,76.835 v1(121.142,77.09)
  Top Layer w0.3: R8.1 v1@121.142,76.835
  Signal Layer 1 w0.1: D1.B8 100.812,87.314 100.812,84.709
  Signal Layer 1 w0.3: 100.812,84.709 107.726,77.795 118.792,77.795 118.971,77.974 120.258,77.974 v1(121.142,77.09)
NetD1_B9: D1.B9 R9.2 | length 33.4
  Top Layer w0.3: R9.2 125.222,106.934 v1(125.222,105.156)
  Signal Layer 2 w0.1: D1.B9 102.082,87.314 106.11,87.314
  Signal Layer 2 w0.3: 106.11,87.314 106.364,87.314 120.523,101.473 121.006,101.473 124.689,105.156 v1(125.222,105.156)
NetD1_B10: D1.B10 R9.1 | length 29.5
  Top Layer w0.3: v1(123.095,105.159) R9.1
  Signal Layer 2 w0.1: D1.B10 103.353,88.584 106.603,88.584
  Signal Layer 2 w0.3: 106.603,88.584 123.095,105.076 v1(123.095,105.159)
NetD1_B11: D1.B11 R10.2 | length 46.2
  Top Layer w0.3: v1(120.523,104.038) R10.2
  Signal Layer 1 w0.1: D1.B11 104.622,87.314 106.299,87.314
  Signal Layer 1 w0.3: 106.299,87.314 107.323,87.314 114.441,80.195 117.797,80.195 118.178,80.576 118.267,80.576 121.862,84.171 121.862,100.017 121.226,100.653 121.226,100.897 120.523,101.6 v1(120.523,104.038)
NetD1_B12: D1.B12 R10.1 | length 31
  Top Layer w0.1: 103.886,96.717 103.362,96.194 103.362,93.664 105.549,93.664 106.502,92.71 106.502,89.193 D1.B12
  Top Layer w0.3: 103.886,96.717 108.179,96.717 R10.1
NetD1_C2: D1.C2 R11.2 | length 34
  Top Layer w0.3: R11.2 v1(71.104,91.11)
  Signal Layer 1 w0.1: 90.424,91.114 93.193,91.114 93.193,89.854 D1.C2
  Signal Layer 1 w0.3: v1(71.104,91.11) 71.2,91.014 90.247,91.014 90.292,91.059 90.424,91.059
NetD1_C3: D1.C3 R11.1 | length 41.9
  Top Layer w0.3: R11.1 69.104,80.375 69.85,79.629 78.105,79.629 78.359,79.883 78.359,83.058 77.044,84.373 v1(74.747,84.373)
  Signal Layer 1 w0.1: D1.C3 94.463,88.583 94.463,86.104 93.853,85.494
  Signal Layer 1 w0.3: v1(74.747,84.373) 92.882,84.373 93.853,85.344 93.853,85.494
NetD1_C4: D1.C4 R12.2 | length 71.2
  Top Layer w0.3: R12.2 75.676,77.74 v1(77.851,75.565)
  Bottom Layer w0.1: D1.C4 95.732,89.854 99.224,89.854 99.543,89.535 99.543,86.106
  Bottom Layer w0.3: v1(77.851,75.565) 82.365,71.051 111.711,71.051 114.046,73.386 114.046,74.752 111.481,77.318 108.331,77.318 99.543,86.106
NetD1_C5: D1.C5 R12.1 | length 38.2
  Top Layer w0.3: R12.1 73.676,75.835 73.66,75.819 74.676,74.803 v1(75.184,74.803)
  Signal Layer 1 w0.1: 91.389,83.261 94.489,83.261 95.733,84.505 95.733,88.584 D1.C5
  Signal Layer 1 w0.3: v1(75.184,74.803) 74.422,74.803 73.431,75.794 73.431,77.368 79.324,83.261 91.389,83.261 91.44,83.312
NetD1_C8: D1.C8 R13.2 | length 51.1
  Top Layer w0.3: v1(119.142,67.107) R13.2
  Signal Layer 1 w0.1: D1.C8 100.812,89.854 103.034,89.854 103.353,89.535 103.353,85.598
  Signal Layer 1 w0.3: 103.353,85.598 104.219,85.598 110.822,78.995 118.294,78.995 118.675,79.376 122.371,79.376 124.275,77.472 124.275,67.887 122.174,65.786 120.142,65.786 119.142,66.786 v1(119.142,67.107)
NetD1_C9: D1.C9 R13.1 | length 43.5
  Top Layer w0.3: R13.1 121.142,67.453 v1(121.158,67.437)
  Signal Layer 1 w0.1: 98.273,85.598 98.273,88.265 98.601,88.593 100.838,88.593 100.838,88.609 D1.C9
  Signal Layer 1 w0.3: 98.273,85.598 98.273,78.74 106.655,70.358 119.126,70.358 121.158,68.326 v1(121.158,67.437)
NetD1_C10: D1.C10 R14.2 | length 35.9
  Top Layer w0.3: v1(125.552,71.695) R14.2
  Bottom Layer w0.1: D1.C10 103.352,88.584 106.11,88.584
  Bottom Layer w0.3: 106.045,88.519 106.11,88.584 113.575,88.584 125.552,76.606 v1(125.552,71.695)
NetD1_C11: D1.C11 R14.1 | length 40.6
  Top Layer w0.3: R14.1 131.318,69.723 132.224,70.629 v1(132.224,72.423)
  Bottom Layer w0.1: D1.C11 104.613,89.844 106.045,89.844
  Bottom Layer w0.3: 106.045,89.844 106.227,89.662 106.426,89.662 106.43,89.666 114.981,89.666 v1(132.224,72.423)
NetD1_D1: D1.D1 R15.2 | length 32.3
  Top Layer w0.3: R15.2 v1(66.405,87.605)
  Signal Layer 1 w0.1: 90.334,89.535 D1.D1
  Signal Layer 1 w0.3: v1(66.405,87.605) 88.404,87.605 90.334,89.535
NetD1_D2: D1.D2 R15.1 | length 36.8
  Top Layer w0.3: R15.1 v1(64.405,86.411)
  Signal Layer 1 w0.1: 90.373,86.411 91.669,86.411 91.923,86.665 91.923,89.854 D1.D2
  Signal Layer 1 w0.3: v1(64.405,86.411) 90.373,86.411 90.424,86.36
NetD1_D3: D1.D3 R16.2 | length 32.5
  Top Layer w0.3: R16.2 70.977,76.616 71.374,76.219 v1(71.374,75.692)
  Bottom Layer w0.1: 90.17,89.863 93.802,89.863 93.802,90.489 D1.D3
  Bottom Layer w0.3: v1(71.374,75.692) 71.374,77.648 75.133,81.407 76.069,81.407 76.762,82.1 76.903,82.1 77.226,82.423 77.269,82.423 84.709,89.863 90.17,89.863
NetD1_D4: D1.D4 R16.1 | length 43.3
  Top Layer w0.3: v1(68.977,75.667) R16.1
  Signal Layer 1 w0.1: D1.D4 95.742,89.844 97.003,89.844 97.003,85.852
  Signal Layer 1 w0.3: v1(68.977,75.667) 71.111,73.533 86.038,73.533 97.003,84.497 97.003,85.852
NetD1_D5: D1.D5 R17.2 | length 28
  Top Layer w0.3: v1(96.596,69.723) 97.104,69.215 R17.2
  Signal Layer 2 w0.1: 95.733,85.598 95.733,89.854 D1.D5
  Signal Layer 2 w0.3: 95.733,85.598 95.733,70.587 v1(96.596,69.723)
NetD1_D6: D1.D6 R17.1 | length 31.5
  Top Layer w0.1: R17.1@105.013,69.723 105.029,69.707 R17.1@105.029,69.215
  Top Layer w0.3: R17.1 105.013,66.945 v1(105.029,66.929)
  Signal Layer 2 w0.1: 97.003,85.471 97.003,89.854 D1.D6
  Signal Layer 2 w0.3: 97.003,85.471 97.003,72.339 102.413,66.929 v1(105.029,66.929)
NetD1_D7: D1.D7 R18.2 | length 37.1
  Top Layer w0.3: R18.2 83.344,106.172 v1(84.328,106.172)
  Signal Layer 2 w0.1: D1.D7 99.542,89.854 102.083,89.854 102.083,96.52
  Signal Layer 2 w0.3: v1(84.328,106.172) 95.809,106.172 95.936,106.299 102.083,100.152 102.083,96.52
NetD1_D8: D1.D8 R18.1 | length 32.1
  Top Layer w0.3: R18.1 83.82,109.601 87.376,106.045 87.376,104.14 v1(90.653,100.863)
  Signal Layer 2 w0.1: D1.D8 100.813,91.124 100.813,96.52
  Signal Layer 2 w0.3: v1(90.653,100.863) 97.18,100.863 100.813,97.231 100.813,96.52
NetD1_D9: D1.D9 R19.2 | length 39.4
  Top Layer w0.1: R19.2 R19.2@81.924,112.157
  Top Layer w0.3: R19.2@81.924,112.166 v1(86.868,112.166)
  Bottom Layer w0.1: 90.551,93.664 97.954,93.664 98.273,93.345 98.273,91.123 100.813,91.123 D1.D9
  Bottom Layer w0.3: v1(86.868,112.166) 86.868,95.885 89.089,93.664 90.551,93.664
NetD1_D10: D1.D10 R19.1 | length 37.4
  Top Layer w0.3: R19.1 v1(87.935,114.157)
  Signal Layer 2 w0.1: D1.D10 103.353,91.124 103.353,96.139
  Signal Layer 2 w0.3: v1(87.935,114.157) 89.773,112.319 91.516,112.319 103.353,100.482 103.353,96.139
PA0: D1.F2 P1.7 | length 66.7
  Signal Layer 2 w0.1: 89.535,95.733 90.018,96.215 92.862,96.215 93.193,95.885 93.193,93.664 D1.F2
  Signal Layer 2 w0.3: P1.7 82.924,39.109 84.201,40.386 84.201,90.399 89.052,95.25 89.535,95.733
PA1: D1.G2 P1.9 | length 58.4
  Top Layer w0.1: 91.211,86.208 91.923,86.919 91.923,93.664 D1.G2
  Top Layer w0.3: P1.9 86.741,40.133 86.741,43.942 89.624,46.825 89.624,84.62 91.211,86.208
PA2: D1.G3 P1.11 | length 77.5
  Signal Layer 2 w0.1: 93.751,97.231 94.463,96.52 94.463,94.934 D1.G3
  Signal Layer 2 w0.3: P1.11 86.359,37.211 82.042,37.211 81.661,37.592 81.661,88.925 89.967,97.231 93.751,97.231
PA3: D1.H2 P1.13 | length 59.9
  Signal Layer 2 w0.1: 90.043,94.615 90.371,94.943 91.932,94.943 D1.H2
  Signal Layer 2 w0.3: 90.043,94.615 90.043,59.563 91.821,57.785 91.821,40.133 P1.13
PA4: D1.H3 P1.15 | length 60.5
  Top Layer w0.1: 93.193,85.979 93.193,94.934 D1.H3
  Top Layer w0.3: P1.15 94.361,40.133 94.361,42.799 90.224,46.936 90.224,82.985 93.218,85.979 93.193,85.979
PA5: D1.H5 P1.17 | length 63.2
  Top Layer w0.1: 95.733,85.471 95.733,94.934 D1.H5
  Top Layer w0.3: P1.17 96.901,40.133 96.901,48.336 91.694,53.543 91.694,69.85 90.824,70.72 90.824,82.452 93.843,85.471 95.733,85.471
PA6: P1.19
PA7: P1.21
PB0: P1.23
PB1: P1.25
PB2: P1.27
PB3: P1.29
PB4: D1.G4 P1.31 | length 79.7
  Top Layer w0.1: D1.G4 94.463,94.933 94.463,95.885 94.92,96.342 96.672,96.342 97.003,96.012 97.003,92.394 99.543,92.394 99.543,94.615 99.861,94.934 101.764,94.934 102.083,94.615 102.083,86.055
  Top Layer w0.3: 102.083,86.055 102.083,84.48 106.977,79.586 109.263,79.586 114.554,74.295 114.554,65.634 112.141,63.221 112.141,40.119 P1.31
PB5: D1.F3 P1.33 | length 71.2
  Signal Layer 2 w0.1: 93.193,85.471 93.193,92.394 D1.F3
  Signal Layer 2 w0.3: 93.193,85.471 93.193,82.205 93.287,82.11 93.287,81.212 92.583,80.508 92.583,54.483 100.711,46.355 105.156,46.355 107.061,44.45 107.061,40.64 107.569,40.132 114.668,40.132 P1.33
PB6: D1.F4 P1.35 | length 86.9
  Signal Layer 2 w0.1: 94.463,85.471 94.463,92.394 D1.F4
  Signal Layer 2 w0.3: 94.463,85.471 94.463,82.632 94.487,82.607 94.487,80.715 94.463,80.69 94.463,70.129 99.341,65.251 105.51,65.251 106.114,65.855 106.114,69.654 105.029,70.739 105.029,73.152 105.791,73.914 106.934,73.914 108.019,72.829 108.019,58.568 117.221,49.366 117.221,40.119 P1.35
PB7: D1.H4 P1.37 | length 71.1
  Signal Layer 2 w0.1: D1.H4 95.744,96.215 97.942,96.215 98.273,95.885 98.273,86.03
  Signal Layer 2 w0.3: 98.273,86.03 122.301,62.001 122.301,40.232 121.024,38.955 P1.37
PC0: P1.6
PC1: P1.8
PC2: P1.10
PC3: P1.12
PC4: P1.14
PC5: P1.16
PC6: P1.18
PC7: P1.20
PD0: P1.22
PD1: P1.24
PD2: P1.26
PD3: P1.28
PD4: P1.30
PD5: P1.32
PD6: P1.34
PD7: P1.36
pads on no net: Cr1.1 D1.F11 D1.G7 D1.H12
copper on no net:
  other v2: 63.721,58.401 98.721,58.401 133.721,58.401 63.721,93.401 133.721,93.401 63.721,128.401 98.721,128.401 133.721,128.401

## Polygon pours and split planes (outlines as drawn)
GND on Bottom Layer "Top Layer-No Net" (solid, pour order 4): 53.721,138.401 143.721,138.401 143.721,33.401 53.721,33.401
GND on Top Layer "Top Layer-No Net" (solid, pour order 3): 53.721,138.401 143.721,138.401 143.721,33.401 53.721,33.401

## Silkscreen, mask and mechanical layers (free items; w line width, h text height)
Top Overlay:
  lines w0.15: 130.705,110.304 131.705,110.304 ; 133.705,107.304 131.705,107.304 ; 133.705,112.304 131.705,112.304 ; 133.705,113.304 131.705,113.304 ; 134.705,112.304 135.705,112.304 ; 135.705,107.304 138.705,107.304 139.205,107.304 139.205,105.804 137.705,105.804 137.705,106.304 137.705,108.304 ; 135.705,108.304 138.705,108.304 ; 136.705,106.304 136.705,108.304 ; 136.705,114.304 136.705,111.304 138.705,111.304 ; 137.705,111.304 137.705,114.304 ; 138.205,110.304 138.705,110.304 ; 138.705,112.304 136.705,112.304 ; 130.705,107.304 130.205,107.304 130.205,105.804 131.705,105.804 131.705,106.304 ; 130.705,107.304 130.705,108.304 ; 130.705,107.304 131.705,107.304 ; 130.705,107.304 130.705,106.304 131.705,106.304 ; 130.705,108.304 131.705,108.304 ; 130.705,108.304 130.705,109.304 ; 130.705,109.304 130.205,109.304 130.205,111.304 130.705,111.304 ; 130.705,109.304 131.705,109.304 ; 130.705,111.304 131.705,111.304 ; 130.705,111.304 130.705,112.304 ; 130.705,112.304 131.705,112.304 ; 130.705,112.304 130.705,113.304 ; 130.705,113.304 130.205,113.304 130.205,114.804 131.705,114.804 131.705,114.304 ; 130.705,113.304 130.705,114.304 131.705,114.304 ; 130.705,113.304 131.705,113.304 ; 131.705,106.304 131.705,107.304 ; 131.705,106.304 132.705,106.304 ; 131.705,107.304 131.705,108.304 ; 131.705,108.304 131.705,109.304 ; 131.705,108.304 133.705,108.304 133.705,106.304 ; 131.705,109.304 132.705,109.304 132.705,106.304 ; 131.705,111.304 132.705,111.304 ; 131.705,111.304 131.705,112.304 ; 131.705,112.304 131.705,113.304 ; 131.705,113.304 131.705,114.304 ; 131.705,114.304 132.705,114.304 ; 132.705,106.304 133.705,106.304 ; 132.705,111.304 133.705,111.304 133.705,114.304 ; 132.705,111.304 132.705,114.304 ; 132.705,114.304 133.705,114.304 ; 133.705,106.304 133.705,105.804 135.205,105.804 135.705,105.804 135.705,106.304 ; 133.705,114.304 133.705,114.804 135.705,114.804 135.705,114.304 ; 134.705,113.304 134.705,111.304 135.705,111.304 135.705,114.304 ; 134.705,113.304 138.705,113.304 139.205,113.304 139.205,114.804 137.705,114.804 137.705,114.304 ; 134.705,113.304 134.705,114.304 135.705,114.304 ; 135.705,106.304 138.705,106.304 138.705,109.304 ; 135.705,106.304 135.705,109.304 136.705,109.304 136.705,108.304 ; 135.705,112.304 136.705,112.304 ; 135.705,112.304 136.705,112.304 ; 135.705,114.304 137.705,114.304 ; 136.705,108.304 137.705,108.304 ; 137.705,108.304 137.705,109.304 138.705,109.304 ; 137.705,114.304 138.705,114.304 138.705,111.304 ; 138.705,109.304 139.205,109.304 139.205,111.304 138.705,111.304
  lines w0.3: 131.705,110.304 132.205,110.304 132.705,110.804 ; 134.205,114.304 134.205,109.704 ; 136.205,110.904 136.205,110.704 137.205,109.704 ; 136.205,111.504 136.205,111.804 ; 136.205,111.704 136.205,110.804 135.705,110.304 135.405,110.604 135.205,110.804 135.205,106.804 134.705,106.304 134.205,106.804 134.205,109.704 ; 137.205,108.804 137.205,110.304 137.705,110.804 138.205,110.304 ; 132.705,110.804 133.305,110.204 133.305,108.804 134.005,109.504 134.205,109.704 ; 132.705,110.804 132.705,110.804
  text "ACK.065.011.16-ПИ1" at 106.807,119.634 h4
Mechanical 1:
  the board outline again, w1

## Text inside footprints (layer, text, board x,y; h text height)
D1: Top Overlay "12" at 105.743,84.121 h0.8; Top Overlay "11" at 104.155,84.121 h0.8; Top Overlay "10" at 102.25,84.121 h0.8; Top Overlay "9" at 101.298,84.121 h0.8; Top Overlay "8" at 100.028,84.121 h0.8; Top Overlay "7" at 98.758,84.121 h0.8; Top Overlay "6" at 97.488,84.121 h0.8; Top Overlay "5" at 96.218,84.121 h0.8; Top Overlay "4" at 94.948,84.121 h0.8; Top Overlay "3" at 93.678,84.121 h0.8; Top Overlay "2" at 92.408,84.121 h0.8; Top Overlay "1" at 91.138,84.121 h0.8; Top Overlay "H" at 89.55,95.234 h0.8; Top Overlay "G" at 89.55,93.964 h0.8; Top Overlay "F" at 89.55,92.694 h0.8; Top Overlay "E" at 89.55,91.424 h0.8; Top Overlay "D" at 89.55,90.154 h0.8; Top Overlay "C" at 89.55,88.884 h0.8; Top Overlay "B" at 89.55,87.614 h0.8; Top Overlay "A" at 89.55,86.344 h0.8
P2: Top Overlay "+2V" at 64.643,47.117 h1.52; Top Overlay "GND" at 64.77,42.926 h1.52; Top Overlay "+3.3V" at 62.992,36.703 h1.52